# EAGLE board tube-tester (EAGLE 6.4)
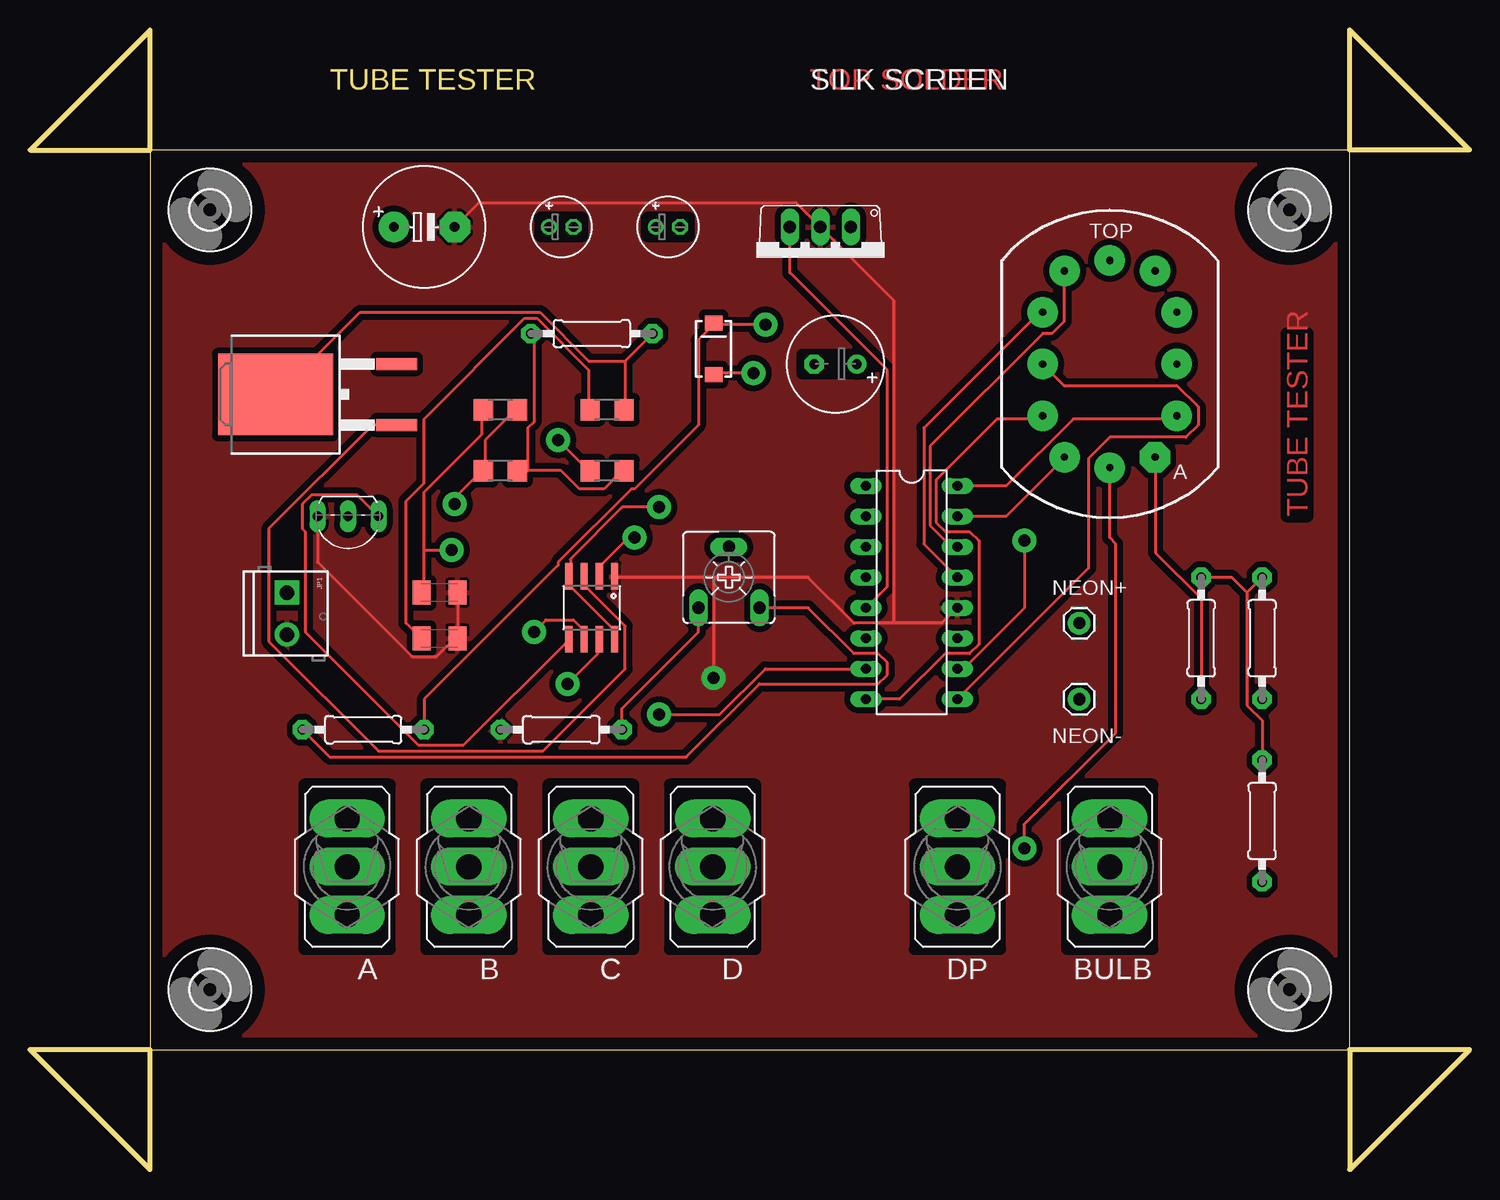
[diagram p0: board, top side]
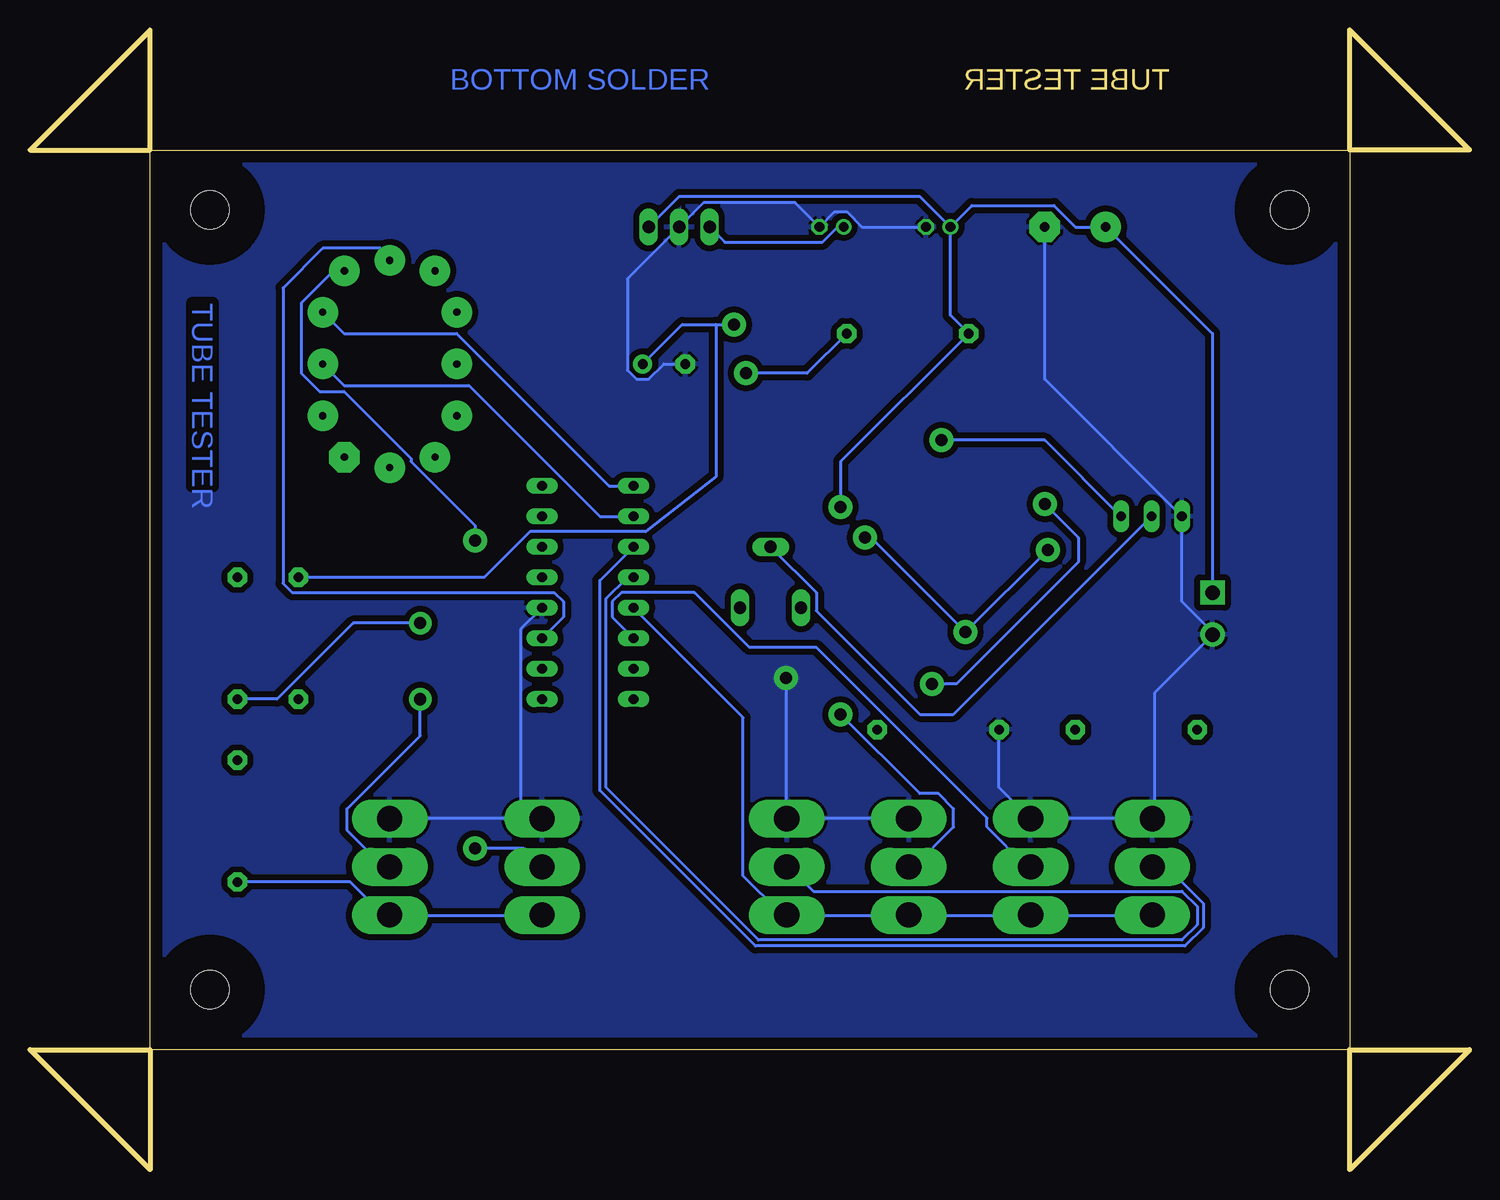
[diagram p1: board, bottom side, seen from below]

Size 120 x 95 mm. Coordinates in mm from the lower left corner, seen from the top.
Outline: 10,10 110,10
Outline: 110,10 110,85
Outline: 110,85 10,85
Outline: 10,85 10,10
Outline: 10,10 0,10 10,0 10,10
Outline: 110,10 110,0 120,10 110,10
Outline: 110,85 110,95 120,85 110,85
Outline: 10,85 10,95 0,85 10,85
Copper layers (1*16): Top 0.035mm / dielectric 1.5mm / Bottom 0.035mm
Design rules "iStivi": minimum track width 10mil, minimum drill 10mil, track to track 10mil, track to pad 10mil, pad to pad 10mil, via to via 2mm, smd to smd 10mil, copper to edge 40mil, drill to drill 8mil, minimum pad ring 10mil, minimum via ring 10mil, stop-mask expansion 0mil, vias tented up to drill 0mil, thermal gap 10mil

## Footprints (pad centres in the part's own frame; a part is rotated, then mirrored left to right if it is on the bottom)
320-916 = drill 2.1 long: 1 0,4.013; 2 0,0; 3 0,-4.013
E5-10,5 = drill 0.8 pad 2.54: + -2.54,0 | drill 0.8 pad 2.54 octagon: - 2.54,0
C1206K = smd 1.5 x 2: 1 -1.5,0; 2 1.5,0
E3,5-8 = drill 0.8 pad 1.6: + -1.778,0 | drill 0.8 pad 1.6 octagon: - 1.778,0
E2-5 = drill 0.813 pad 1.27: + -1.016,0 | drill 0.813 pad 1.27 octagon: - 1.016,0
SMA-DIODE = smd 1.27 x 1.47: A -2.15,0; C 2.15,0
SO08 = smd 0.61 x 2.21: 1 -1.905,-2.616; 2 -0.635,-2.616; 3 0.635,-2.616; 4 1.905,-2.616; 5 1.905,2.616; 6 0.635,2.616; 7 -0.635,2.616; 8 -1.905,2.616
DIL16 = drill 0.813 long: 1 -8.89,-3.81; 2 -6.35,-3.81; 3 -3.81,-3.81; 4 -1.27,-3.81; 5 1.27,-3.81; 6 3.81,-3.81; 7 6.35,-3.81; 8 8.89,-3.81; 9 8.89,3.81; 10 6.35,3.81; 11 3.81,3.81; 12 1.27,3.81; 13 -1.27,3.81; 14 -3.81,3.81; 15 -6.35,3.81; 16 -8.89,3.81
TO220V = drill 1.016 long: 1 -2.54,-2.54; 2 0,-2.54; 3 2.54,-2.54
SCREWTERMINAL-3.5MM-2 = drill 1.2 pad 2.032 square: 1 0,0 | drill 1.2 pad 2.032: 2 3.5,0
0207/10 = drill 0.8 pad 1.6 octagon: 1 -5.08,0; 2 5.08,0
IN-12 = drill 0.6 pad 2.54: 0 5.59,-4.32; 1 -3.78,-7.766; 2 -5.59,-4.32; 3 -5.59,0; 4 -5.59,4.32; 5 -3.78,7.766; 6 0,8.64; 7 3.78,7.766; 8 5.59,4.32; 9 5.59,0; LHDP 0,-8.64 | drill 0.6 pad 2.54 octagon: A 3.78,-7.766
1X01 = drill 1.016 pad 1.88: 1 0,0
TO263 = smd 1 x 3.4: 1 -2.54,-6.6; 2 2.54,-6.6 | smd 6.8 x 9.6: 3 0,3.5
TO92-EBC = drill 0.813 long: B 0,-1.27; C -2.54,-1.27; E 2.54,-1.27
R1206 = smd 1.6 x 1.803: 1 -1.422,0; 2 1.422,0
3,2 = hole 3.2: 0,0
CA6V = drill 1.016 long: A -2.54,-2.54; E 2.54,-2.54; S 0,2.54

## Placement (x,y rotation side)
A  [320-916]  26.43,25.24 180 top
B  [320-916]  36.59,25.24 180 top
BULB  [320-916]  90.01,25.24 180 top
C  [320-916]  46.75,25.24 180 top
C1  330uF  [E5-10,5]  32.86,78.58 0 top
C2  2n2  [C1206K]  34.13,48.1 0 top
C3  100pF  [C1206K]  34.13,44.29 0 top
C4  2.2uF  [E3,5-8]  67.15,67.15 180 top
C5  100uF  [E2-5]  44.29,78.58 0 top
C6  10uF  [E2-5]  53.18,78.58 0 top
D  [320-916]  56.91,25.24 180 top
D1  1N4007  [SMA-DIODE]  56.99,68.42 90 top
DP  [320-916]  77.31,25.24 180 top
IC1  NE555D  [SO08]  46.83,46.83 180 top
IC2  74141N  [DIL16]  73.5,48.1 270 top
IC3  7805  [TO220V]  65.88,76.04 180 top
JP1  [SCREWTERMINAL-3.5MM-2]  21.43,48.1 270 top
L1  100uH  [0207/10]  46.83,69.69 180 top
N1  IN-12BIN-12  [IN-12]  90.01,67.15 0 top
NEON+  M01PTH  [1X01]  87.47,45.56 0 top
NEON-  M01PTH  [1X01]  87.47,39.21 0 top
Q1  IRF740S  [TO263]  23.97,64.61 90 top
Q2  BC546  [TO92-EBC]  26.51,53.18 180 top
R1  56K  [R1206]  48.1,58.26 0 top
R2  10K  [R1206]  39.21,63.34 0 top
R3  1K  [R1206]  39.21,58.26 0 top
R4  470R  [0207/10]  44.29,36.67 0 top
R5  220K  [0207/10]  27.78,36.67 0 top
R6  2K2  [R1206]  48.1,63.34 0 top
R7  22K  [0207/10]  97.63,44.29 90 top
R8  22K  [0207/10]  102.71,44.29 90 top
R9  22K  [0207/10]  102.71,29.05 90 top
U$1  [3,2]  15,15 0 top
U$2  [3,2]  105,15 0 top
U$3  [3,2]  105,80 0 top
U$4  [3,2]  15,80 0 top
VR1  1K  [CA6V]  58.26,49.37 0 top

## Library data of the parts
A B BULB C D DP = iStivi - Button-Switch
C1-C6 D1 L1 R1-R9 VR1 = iStivi - RCLD
IC1 IC2 = iStivi - ICs
IC3 = iStivi - Transistor-FET-reg
JP1 NEON+ NEON- = iStivi - Header-Connector
N1 = iStivi - Tubes
Q1 Q2 = iStivi - Transistor-FET
U$1-U$4 = iStivi - Board-Holes

## Nets
GND: A.3 B.3 BULB.3 C1.- C2.2 C3.2 C4.- C5.- C6.- C.3 D.3 DP.3 IC1.1 IC2.12 IC3.2 JP1.2 Q2.E R4.1
N$1: IC1.3 Q1.1
N$2: C3.1 R6.1
N$3: IC1.5 Q2.C R1.1
N$4: IC1.7 R2.2 R3.1
N$5: C2.1 IC1.2 IC1.6 R2.1
N$6: D1.A L1.1 Q1.3 R6.2
N$7: C4.+ D1.C R5.2 R7.2 R8.2 R9.2
N$8: R5.1 VR1.E
N$9: R4.2 VR1.A
N$10: Q2.B VR1.S
N$11: IC2.15 N1.1
N$12: IC2.8 N1.2
N$13: IC2.9 N1.3
N$14: IC2.13 N1.4
N$15: IC2.14 N1.5
N$16: IC2.11 N1.6
N$17: IC2.10 N1.7
N$18: IC2.1 N1.8
N$19: IC2.2 N1.9
N$20: IC2.16 N1.0
N$21: N1.A R7.1
N$22: A.2 IC2.3
N$23: B.2 IC2.6
N$24: C.2 IC2.7
N$25: D.2 IC2.4
N$26: C1.+ C5.+ IC1.4 IC1.8 IC3.1 JP1.1 L1.2 R1.2 R3.2
N$27: NEON+.1 R8.1
N$28: BULB.2 NEON-.1
N$29: A.1 B.1 C6.+ C.1 D.1 IC2.5 IC3.3
N$30: DP.2 N1.LHDP
N$32: BULB.1 DP.1 R9.1

## Tracks (layer width: path | path; a pad name or v marks a point on that pad's centre or on a via)
GND  (via drill 1)
  Top 0.254: 56.99,49.37 64.86,49.37 68.67,45.56 71.98,45.56 | 56.99,49.37 48.86,49.37 IC1.1 | 71.98,45.56 76.04,45.56 IC2.12 | 56.99,49.37 v56.99,40.99 | C2.2 35.65,48.1 35.65,44.29 C3.2 35.4,44.29 33.88,42.77 31.84,42.77 23.97,50.64 Q2.E | C1.- 37.43,80.61 63.85,80.61 IC3.2 71.98,72.48 71.98,45.56
  Bottom 0.254: 79.09,29.3 90.01,29.3 BULB.3 | 79.09,29.3 77.31,29.3 DP.3 79.09,29.3 | C.3 46.83,29.3 56.74,29.3 D.3 56.99,29.3 v56.99,40.99 | 79.09,29.3 79.09,45.05 IC2.12 | C5.- 50.64,78.58 51.91,79.85 52.93,79.85 C6.- 56.23,80.61 63.85,80.61 IC3.2 70.2,74.26 70.2,66.64 69.44,65.88 68.42,65.88 67.15,67.15 C4.- | R4.1 39.21,31.84 36.67,29.3 B.3 36.42,29.3 26.51,29.3 A.3 26.26,29.3 26.26,39.72 21.43,44.54 JP1.2 21.43,44.8 23.97,47.34 Q2.E 35.4,65.88 C1.-
  pour Bottom (isolate 0.5): 10,10 110,10 110,85 10,85
  pour Top (isolate 0.5): 10,10 110,10 110,85 10,85
N$1
  Top 0.254: Q1.1 28.54,62.07 19.91,53.43 19.91,44.04 29.05,34.89 42.77,34.89 49.62,41.75 49.62,45.31 46.32,48.61 46.32,49.37 IC1.3
N$2
  Top 0.254: R6.1 46.58,63.34 46.58,66.64 42.26,70.96 41.24,70.96 32.86,62.58 32.86,57.24 31.34,55.72 31.34,45.56 32.61,44.29 C3.1
N$3  (via drill 1)
  Top 0.254: v44.04,60.8 46.58,58.26 R1.1 | Q2.C 27.27,56.23 23.46,56.23 22.7,55.47 22.7,53.43 22.95,53.18 22.95,44.8 32.35,35.4 36.16,35.4 44.8,44.04 IC1.5
  Bottom 0.254: v44.04,60.8 35.4,60.8 Q2.C
N$4  (via drill 1)
  Top 0.254: R2.2 40.48,63.34 37.94,60.8 37.94,58.26 R3.1 37.69,58.26 35.4,55.97 v35.4,55.47 | v44.8,40.48 47.34,43.02 47.34,44.04 IC1.7
  Bottom 0.254: v44.8,40.48 42.77,40.48 32.61,50.64 32.61,52.67 v35.4,55.47
N$5  (via drill 1)
  Top 0.254: 32.86,51.66 32.86,48.1 C2.1 | 32.86,51.66 32.86,56.48 37.69,61.31 37.69,63.34 R2.1 | v42,44.8 43.02,45.81 45.31,45.81 46.07,45.05 46.07,44.29 IC1.6 | 32.86,51.66 v35.15,51.66 | v50.39,52.67 49.88,52.67 47.59,50.39 47.59,49.62 IC1.2
  Bottom 0.254: v35.15,51.66 v42,44.8 49.88,52.67 v50.39,52.67
N$6  (via drill 1)
  Top 0.254: v60.29,66.39 56.99,66.39 D1.A | 49.62,67.4 49.62,63.34 R6.2 | L1.1 49.62,67.4 | 49.62,67.4 46.58,67.4 42.51,71.47 27.53,71.47 20.67,64.61 Q1.3
  Bottom 0.254: v60.29,66.39 55.21,66.39 L1.1
N$7  (via drill 1)
  Top 0.254: R9.2 102.71,37.43 101.44,38.7 101.44,48.1 | R8.2 101.44,48.1 | R7.2 100.17,49.37 101.44,48.1 | v61.31,70.45 56.99,70.45 | R5.2 32.86,39.21 44.04,50.39 44.04,50.64 50.13,56.74 50.39,56.74 55.72,62.07 55.72,69.18 56.99,70.45 | 56.99,70.45 D1.C
  Bottom 0.254: 62.83,70.45 65.63,70.45 C4.+ | R7.2 82.14,49.37 78.33,53.18 68.67,53.18 62.83,57.75 62.83,70.45 | 62.83,70.45 v61.31,70.45
N$8
  Top 0.254: VR1.E 64.86,46.83 68.67,43.02 70.71,43.02 71.47,42.26 71.47,41.24 70.71,40.48 60.8,40.48 54.7,34.38 24.99,34.38 R5.1
N$9
  Top 0.254: VR1.A 55.72,44.8 49.37,38.45 R4.2
N$10
  Bottom 0.254: Q2.B 43.02,37.94 45.81,37.94 54.45,46.58 54.45,48.1 VR1.S
N$11
  Top 0.254: IC2.15 81.37,54.45 86.2,59.28 N1.1
N$12
  Top 0.254: IC2.8 72.48,39.21 76.29,43.02 78.33,43.02 79.09,43.78 79.09,52.42 78.33,53.18 76.29,53.18 75.53,53.94 75.53,57.5 80.61,62.58 84.17,62.58 N1.2
N$13
  Top 0.254: IC2.9 88.23,50.13 88.23,59.28 90.01,61.05 96.36,61.05 97.38,62.07 97.38,63.59 95.6,65.37 86.2,65.37 N1.3
N$14
  Top 0.254: IC2.13 74.52,52.16 74.52,61.82 84.17,71.47 N1.4
N$15
  Top 0.254: IC2.14 76.8,51.91 75.02,53.69 75.02,60.29 84.42,69.69 85.18,69.69 86.2,70.71 86.2,74.77 N1.5
N$16
  Bottom 0.254: IC2.11 75.53,46.07 75.53,47.34 76.29,48.1 98.14,48.1 98.9,48.86 98.9,73.5 95.6,76.8 90.77,76.8 90.01,76.04 N1.6
N$17  (via drill 1)
  Top 0.254: IC2.10 77.82,41.75 82.9,46.83 v82.9,52.42
  Bottom 0.254: v82.9,52.42 82.9,53.69 88.23,59.02 88.23,59.28 93.82,64.86 95.85,64.86 97.38,66.39 97.38,72.23 94.84,74.77 93.82,74.77 N1.7
N$18
  Bottom 0.254: IC2.1 71.72,56.99 84.42,69.69 93.82,69.69 N1.8
N$19
  Bottom 0.254: IC2.2 72.48,54.45 83.41,65.37 93.82,65.37 N1.9
N$20
  Top 0.254: IC2.16 81.37,56.99 86.96,62.58 95.6,62.58 N1.0
N$21
  Top 0.254: R7.1 97.63,47.59 93.82,51.4 93.82,59.28 N1.A
N$22
  Bottom 0.254: IC2.3 72.48,49.12 72.48,31.59 59.53,18.64 23.72,18.64 22.19,20.16 22.19,22.19 25.24,25.24 A.2
N$23
  Bottom 0.254: IC2.6 71.47,46.07 71.47,47.34 70.71,48.1 64.61,48.1 60.04,43.53 54.45,43.53 40.23,29.3 40.23,28.54 36.92,25.24 B.2
N$24  (via drill 1)
  Top 0.254: IC2.7 61.31,41.75 57.5,37.94 v52.42,37.94
  Bottom 0.254: v52.42,37.94 45.81,31.34 44.29,31.34 43.02,30.07 43.02,28.54 46.32,25.24 C.2
N$25
  Bottom 0.254: IC2.4 70.2,49.37 71.98,47.59 71.98,31.84 59.28,19.14 23.97,19.14 22.7,20.41 22.7,21.94 23.97,23.21 54.7,23.21 56.74,25.24 D.2
N$26  (via drill 1)
  Top 0.254: IC1.8 48.61,44.29 48.61,45.05 45.05,48.61 45.05,49.37 IC1.4 45.05,49.62 45.05,50.89 49.37,55.21 v52.42,55.21 | 41.5,58.26 44.29,58.26 45.81,56.74 47.85,56.74 49.37,58.26 R1.2 | 41.5,58.26 R3.2 | 41.5,58.26 41.5,61.82 42,62.32 42,69.44 L1.2
  Bottom 0.254: JP1.1 21.43,69.69 C1.+ 32.86,78.58 34.64,80.36 41.5,80.36 C5.+ | C5.+ 43.27,71.21 L1.2 52.42,59.02 v52.42,55.21 | IC3.1 65.88,81.12 45.81,81.12 C5.+
N$27
  Bottom 0.254: R8.1 99.41,39.21 93.06,45.56 NEON+.1
N$28
  Bottom 0.254: NEON-.1 87.47,36.16 93.57,30.07 93.57,28.29 90.52,25.24 BULB.2
N$29
  Top 0.254: IC3.3 63.34,74.77 71.47,66.64 71.47,48.61 IC2.5
  Bottom 0.254: A.1 26.51,21.18 36.42,21.18 B.1 36.67,21.18 46.58,21.18 C.1 46.83,21.18 56.74,21.18 D.1 56.99,21.43 57.5,21.43 60.55,24.48 60.55,37.69 IC2.5 | C6.+ 52.67,78.58 53.94,77.31 62.07,77.31 IC3.3
N$30  (via drill 1)
  Top 0.254: N1.LHDP 90.01,52.67 90.52,52.16 90.52,36.42 82.9,28.8 v82.9,26.76
  Bottom 0.254: v82.9,26.76 78.83,26.76 DP.2
N$32
  Bottom 0.254: R9.1 93.31,23.97 90.77,21.43 90.01,21.43 BULB.1 90.01,21.18 77.31,21.18 DP.1

## Text on the board
Top: TOP SOLDER | TUBE TESTER
Bottom: BOTTOM SOLDER | TUBE TESTER
Dimension: TUBE TESTER
tNames: SILK SCREEN
tStop: TOP MASK
bStop: BOTTOM MASK